# EAGLE board mpsfet_X4 (EAGLE 6.6.0)
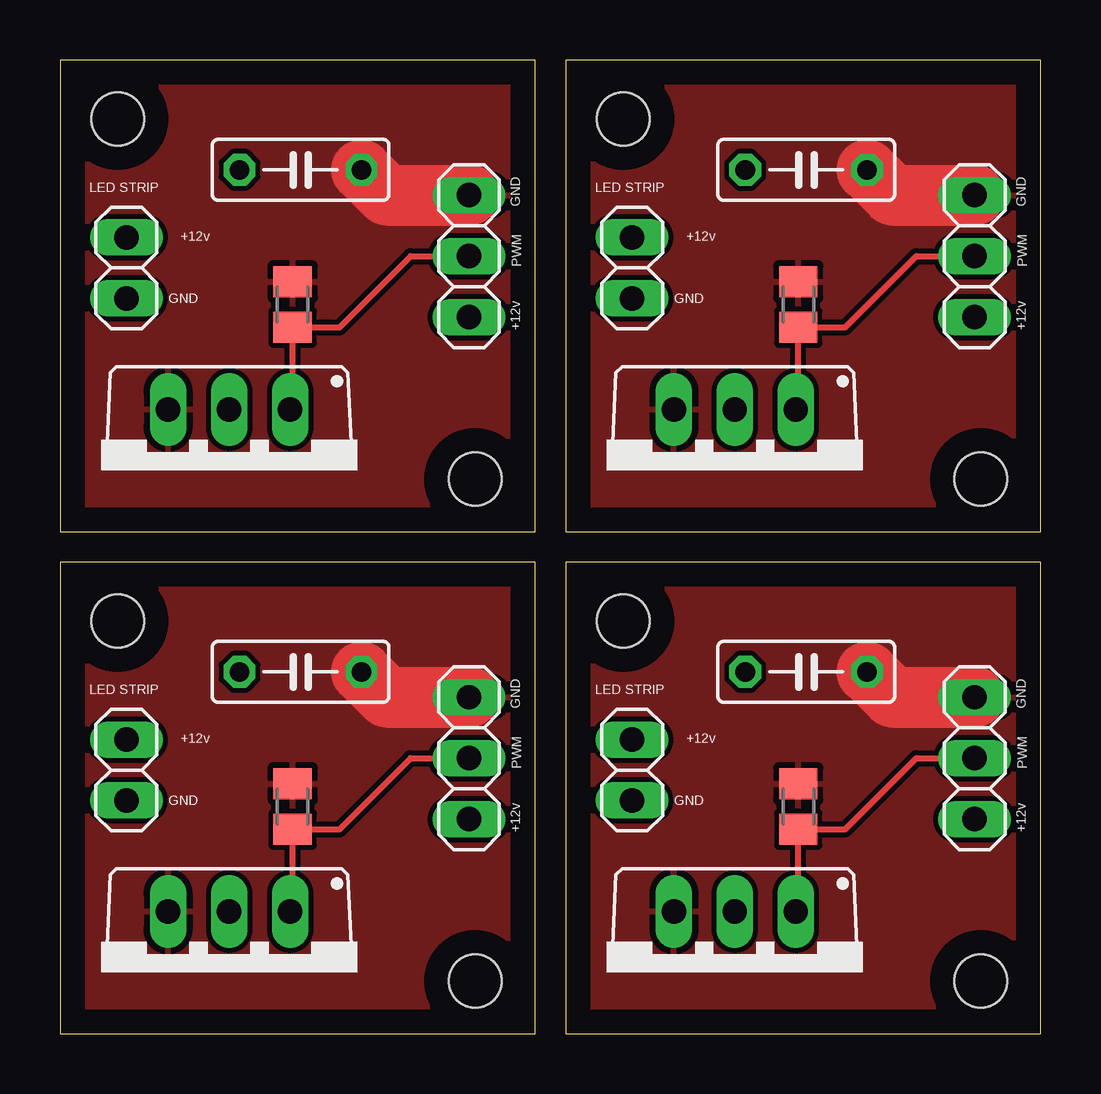
[diagram p0: board, top side]
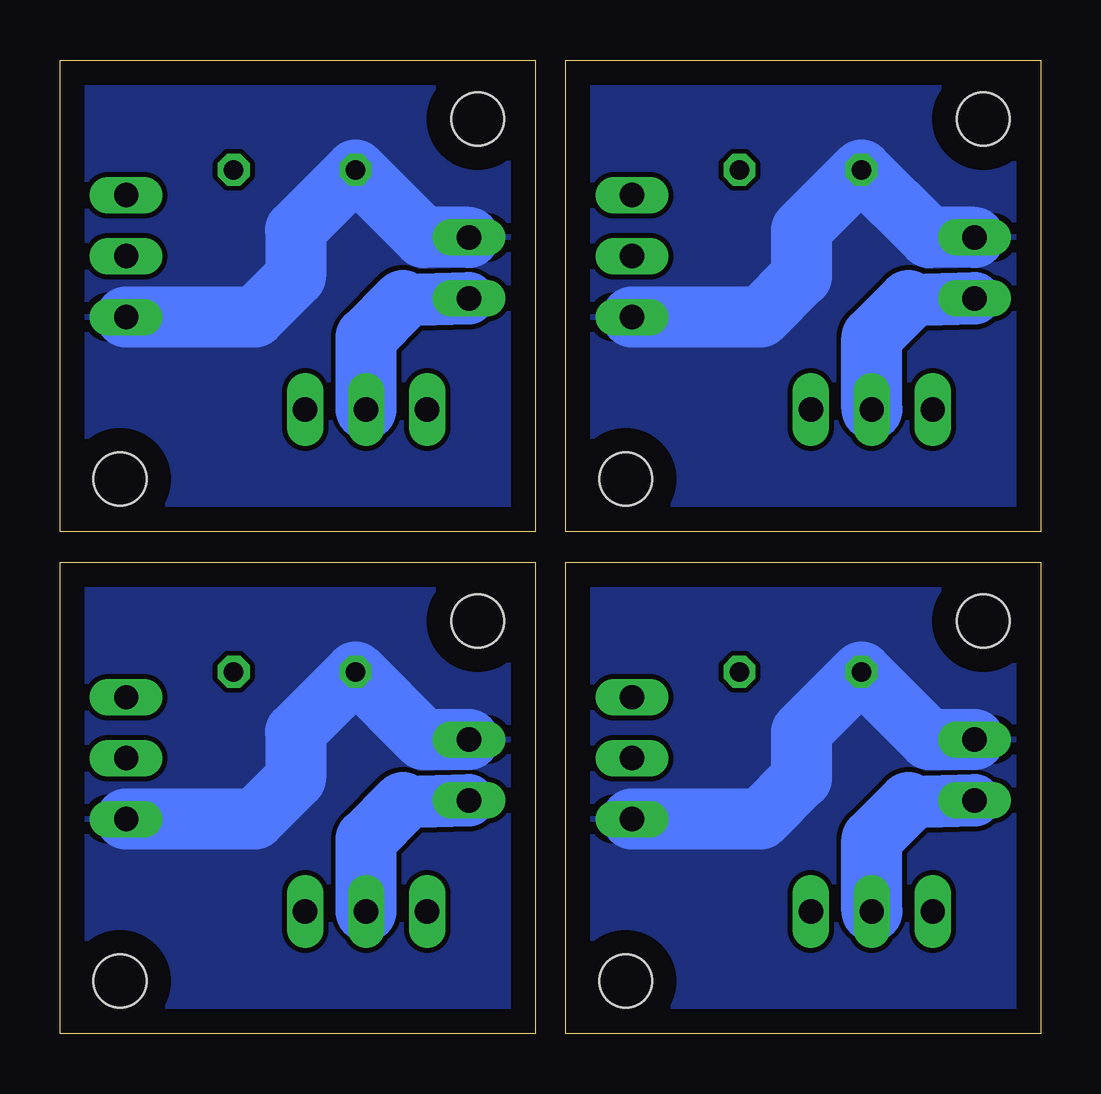
[diagram p1: board, bottom side, seen from below]

Size 40.87 x 40.58 mm. Coordinates in mm from the lower left corner, seen from the top.
Outline: 0,0 19.8,0 19.8,19.66 0,19.66 0,0
Outline: 0,20.92 19.8,20.92 19.8,40.58 0,40.58 0,20.92
Outline: 21.07,0 40.87,0 40.87,19.66 21.07,19.66 21.07,0
Outline: 21.07,20.92 40.87,20.92 40.87,40.58 21.07,40.58 21.07,20.92
Copper layers (1*16): Top 0.035mm / dielectric 1.5mm / Bottom 0.035mm
Design rules "default": minimum track width 10mil, minimum drill 24mil, track to track 8mil, track to pad 8mil, pad to pad 8mil, via to via 8mil, smd to smd 8mil, copper to edge 40mil, drill to drill 8mil, minimum pad ring 10mil, minimum via ring 8mil, stop-mask expansion 4mil, vias tented up to drill 0mil, thermal gap 10mil
Holes 2.2 mm at 2.4,17.2 17.3,2.2 2.4,38.12 17.3,23.12 23.47,17.2 38.37,2.2 23.47,38.12 38.37,23.12

## Footprints (pad centres in the part's own frame; a part is rotated, then mirrored left to right if it is on the bottom)
C050-025X075 = drill 0.813 octagon: 1 -2.54,0; 2 2.54,0
1X03 = drill 1.016 long: 1 -2.54,0; 2 0,0; 3 2.54,0
1X02 = drill 1.016 long: 1 -1.27,0; 2 1.27,0
TO220BV = drill 1.016 long: D 0,-2.54; G -2.54,-2.54; S 2.54,-2.54
M0805 = smd 1.3 x 1.6: 1 -0.95,0; 2 0.95,0

## Placement (x,y rotation side)
C1  [C050-025X075]  10.02,15.09 0 top
C2  [C050-025X075]  10.02,36 0 top
C3  [C050-025X075]  31.09,15.09 0 top
C4  [C050-025X075]  31.09,36 0 top
JP1  [1X03]  17.04,11.49 90 top
JP2  [1X02]  2.77,10.99 270 top
JP3  [1X03]  17.04,32.41 90 top
JP4  [1X02]  2.77,31.91 270 top
JP5  [1X03]  38.11,11.49 90 top
JP6  [1X02]  23.84,10.99 270 top
JP7  [1X03]  38.11,32.41 90 top
JP8  [1X02]  23.84,31.91 270 top
Q1  [TO220BV]  7.05,2.56 180 top
Q2  [TO220BV]  7.05,23.48 180 top
Q3  [TO220BV]  28.12,2.56 180 top
Q4  [TO220BV]  28.12,23.48 180 top
R1  [M0805]  9.69,9.47 270 top
R2  [M0805]  9.69,30.39 270 top
R3  [M0805]  30.76,9.47 270 top
R4  [M0805]  30.76,30.39 270 top

## Library data of the parts
C1-C4 = rcl
JP1-JP8 = pinhead
Q1-Q4 = transistor-power
R1-R4 = resistor

## Nets
+15V: C1.1 JP1.1 JP2.1
+15V1: C2.1 JP3.1 JP4.1
+15V2: C3.1 JP5.1 JP6.1
+15V3: C4.1 JP7.1 JP8.1
GND: C1.2 JP1.3 Q1.S R1.1
GND1: C2.2 JP3.3 Q2.S R2.1
GND2: C3.2 JP5.3 Q3.S R3.1
GND3: C4.2 JP7.3 Q4.S R4.1
LED_STRIP_GND: JP2.2 Q1.D
LED_STRIP_GND1: JP4.2 Q2.D
LED_STRIP_GND2: JP6.2 Q3.D
LED_STRIP_GND3: JP8.2 Q4.D
SIGNAL: JP1.2 Q1.G R1.2
SIGNAL1: JP3.2 Q2.G R2.2
SIGNAL2: JP5.2 Q3.G R3.2
SIGNAL3: JP7.2 Q4.G R4.2

## Tracks (layer width: path | path; a pad name or v marks a point on that pad's centre or on a via)
+15V
  Bottom 2.54: JP2.1 4.66,12.26 C1.1 9.98,12.59 9.98,10.64 11.68,8.95 JP1.1
  pour Bottom: 0.23,19.35 0.23,0.23 19.46,0.23 19.46,19.35
+15V1
  Bottom 2.54: JP4.1 4.66,33.18 C2.1 9.98,33.5 9.98,31.56 11.68,29.86 JP3.1
  pour Bottom: 0.23,40.27 0.23,21.15 19.46,21.15 19.46,40.27
+15V2
  Bottom 2.54: JP6.1 25.73,12.26 C3.1 31.05,12.59 31.05,10.64 32.75,8.95 JP5.1
  pour Bottom: 21.3,19.35 21.3,0.23 40.53,0.23 40.53,19.35
+15V3
  Bottom 2.54: JP8.1 25.73,33.18 C4.1 31.05,33.5 31.05,31.56 32.75,29.86 JP7.1
  pour Bottom: 21.3,40.27 21.3,21.15 40.53,21.15 40.53,40.27
GND
  Top 2.54: C1.2 13.62,14.03 JP1.3
  pour Top: 0.23,19.35 0.23,0.23 19.56,0.23 19.56,19.35
GND1
  Top 2.54: C2.2 13.62,34.94 JP3.3
  pour Top: 0.23,40.27 0.23,21.15 19.56,21.15 19.56,40.27
GND2
  Top 2.54: C3.2 34.69,14.03 JP5.3
  pour Top: 21.3,19.35 21.3,0.23 40.63,0.23 40.63,19.35
GND3
  Top 2.54: C4.2 34.69,34.94 JP7.3
  pour Top: 21.3,40.27 21.3,21.15 40.63,21.15 40.63,40.27
LED_STRIP_GND
  Bottom 2.184: 5.52,9.65 JP2.2
  Bottom 2.54: Q1.D 7.05,8.12 5.52,9.65
LED_STRIP_GND1
  Bottom 2.184: 5.52,30.57 JP4.2
  Bottom 2.54: Q2.D 7.05,29.04 5.52,30.57
LED_STRIP_GND2
  Bottom 2.184: 26.59,9.65 JP6.2
  Bottom 2.54: Q3.D 28.12,8.12 26.59,9.65
LED_STRIP_GND3
  Bottom 2.184: 26.59,30.57 JP8.2
  Bottom 2.54: Q4.D 28.12,29.04 26.59,30.57
SIGNAL
  Top 0.254: Q1.G 9.69,5.1 R1.2 11.65,8.52 14.61,11.49 JP1.2
SIGNAL1
  Top 0.254: Q2.G 9.69,26.02 R2.2 11.65,29.44 14.61,32.4 JP3.2
SIGNAL2
  Top 0.254: Q3.G 30.76,5.1 R3.2 32.72,8.52 35.68,11.49 JP5.2
SIGNAL3
  Top 0.254: Q4.G 30.76,26.02 R4.2 32.72,29.44 35.68,32.4 JP7.2

## Text on the board
tNames: LED STRIP | LED STRIP | GND | GND | +12v | +12v | PWM | PWM | GND | GND | +12v | +12v | LED STRIP | LED STRIP | GND | GND | +12v | +12v | PWM | PWM | GND | GND | +12v | +12v